# Allegro board panelized_board.brd
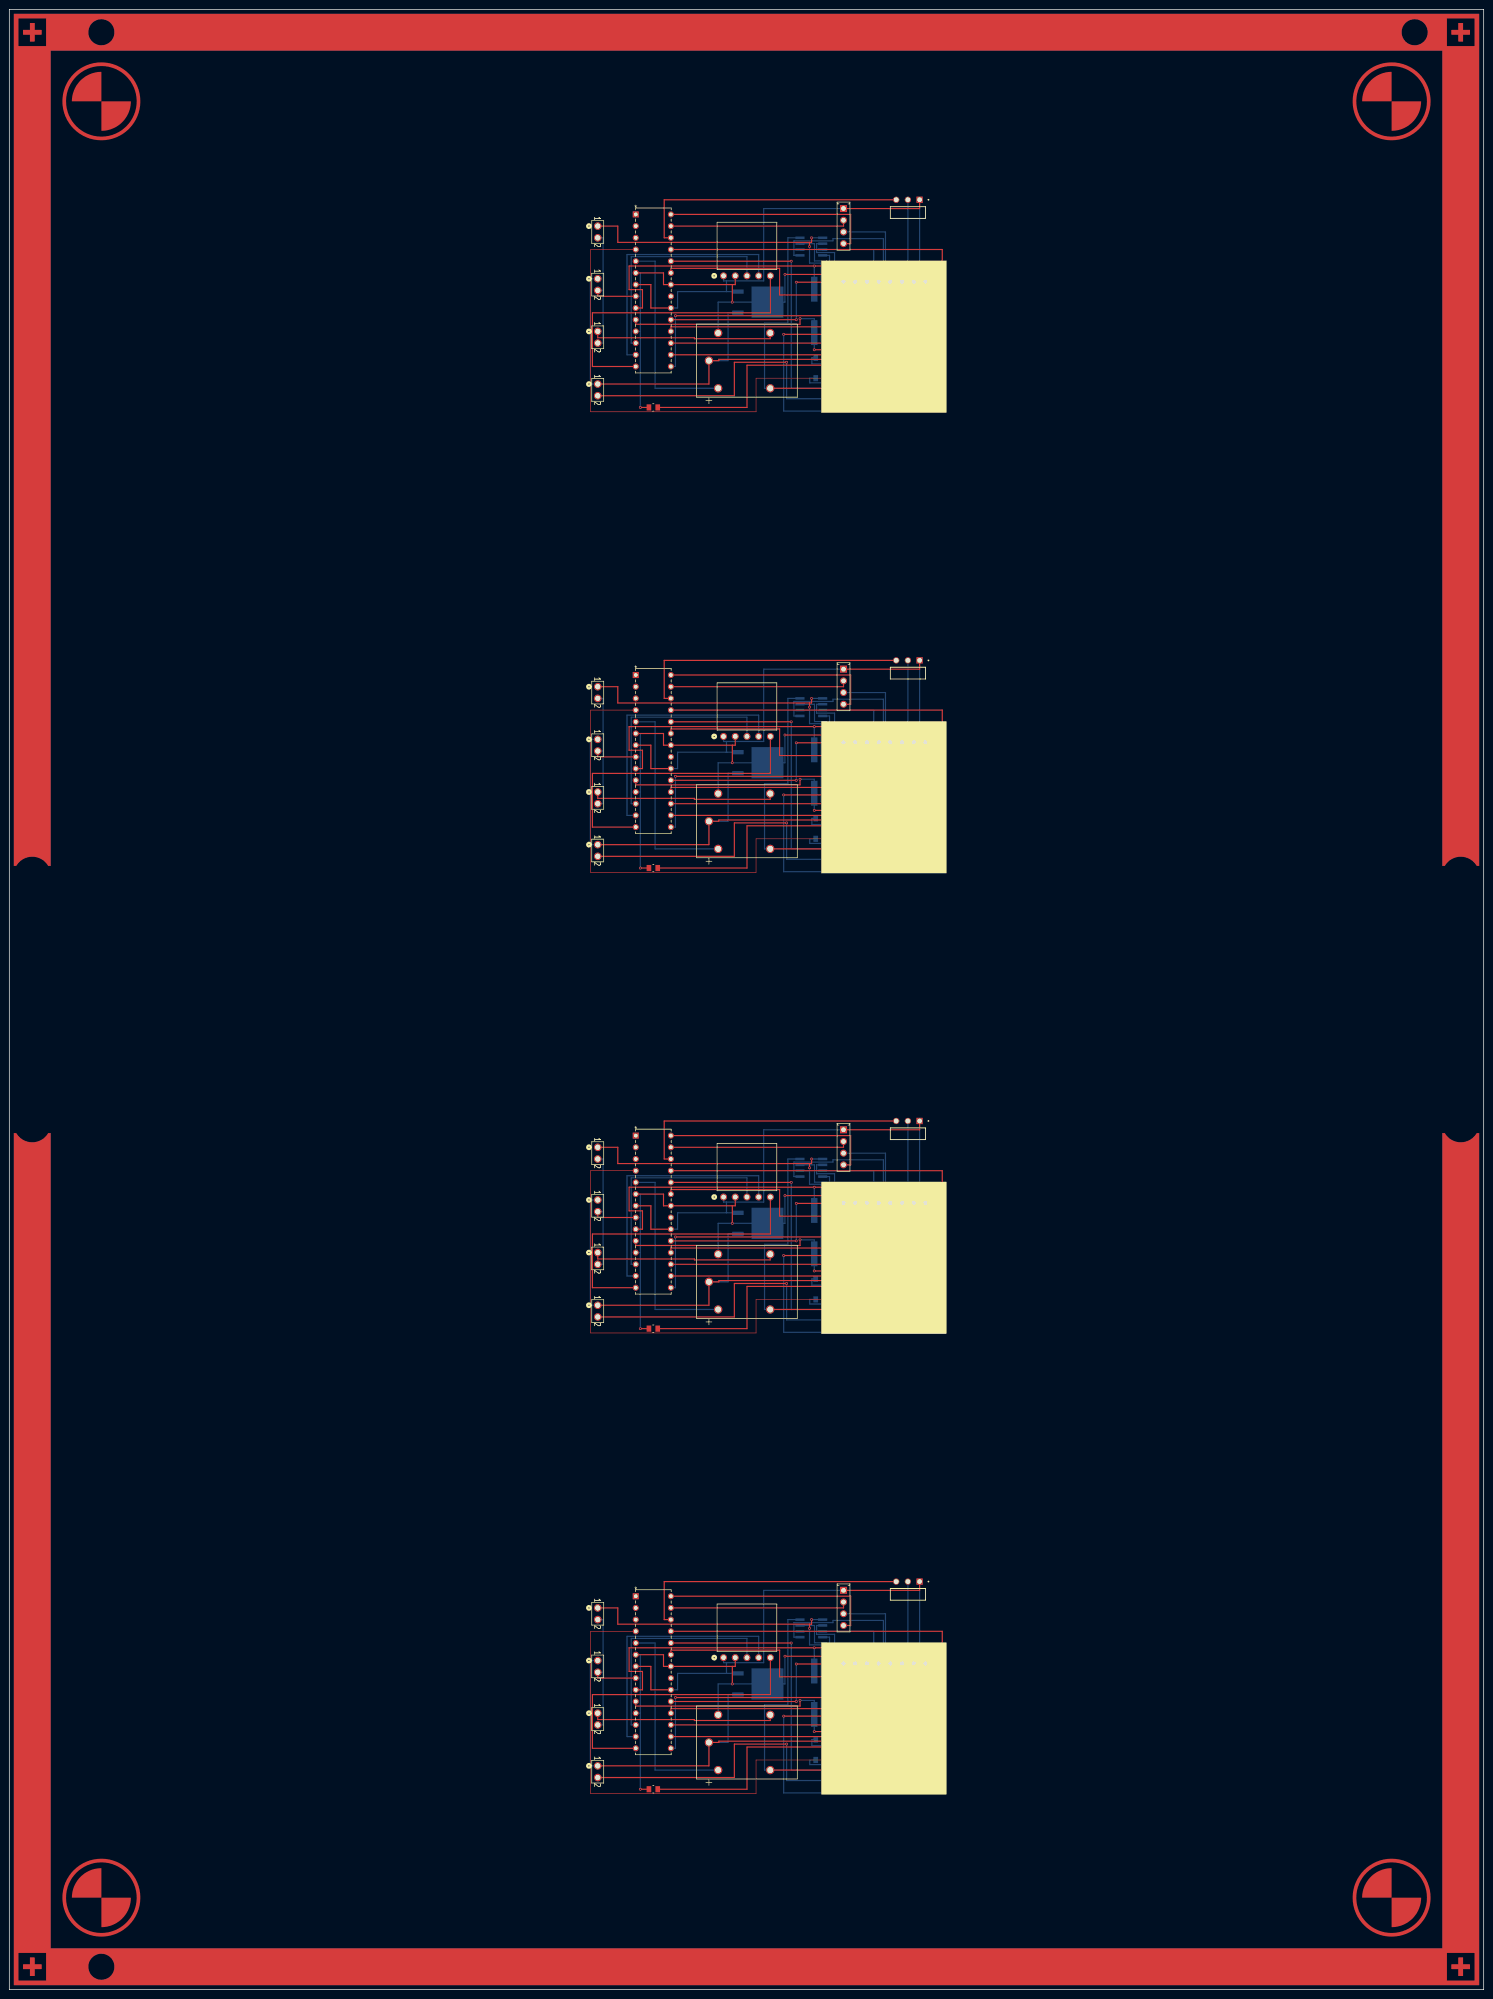
[diagram p0: board, top side]
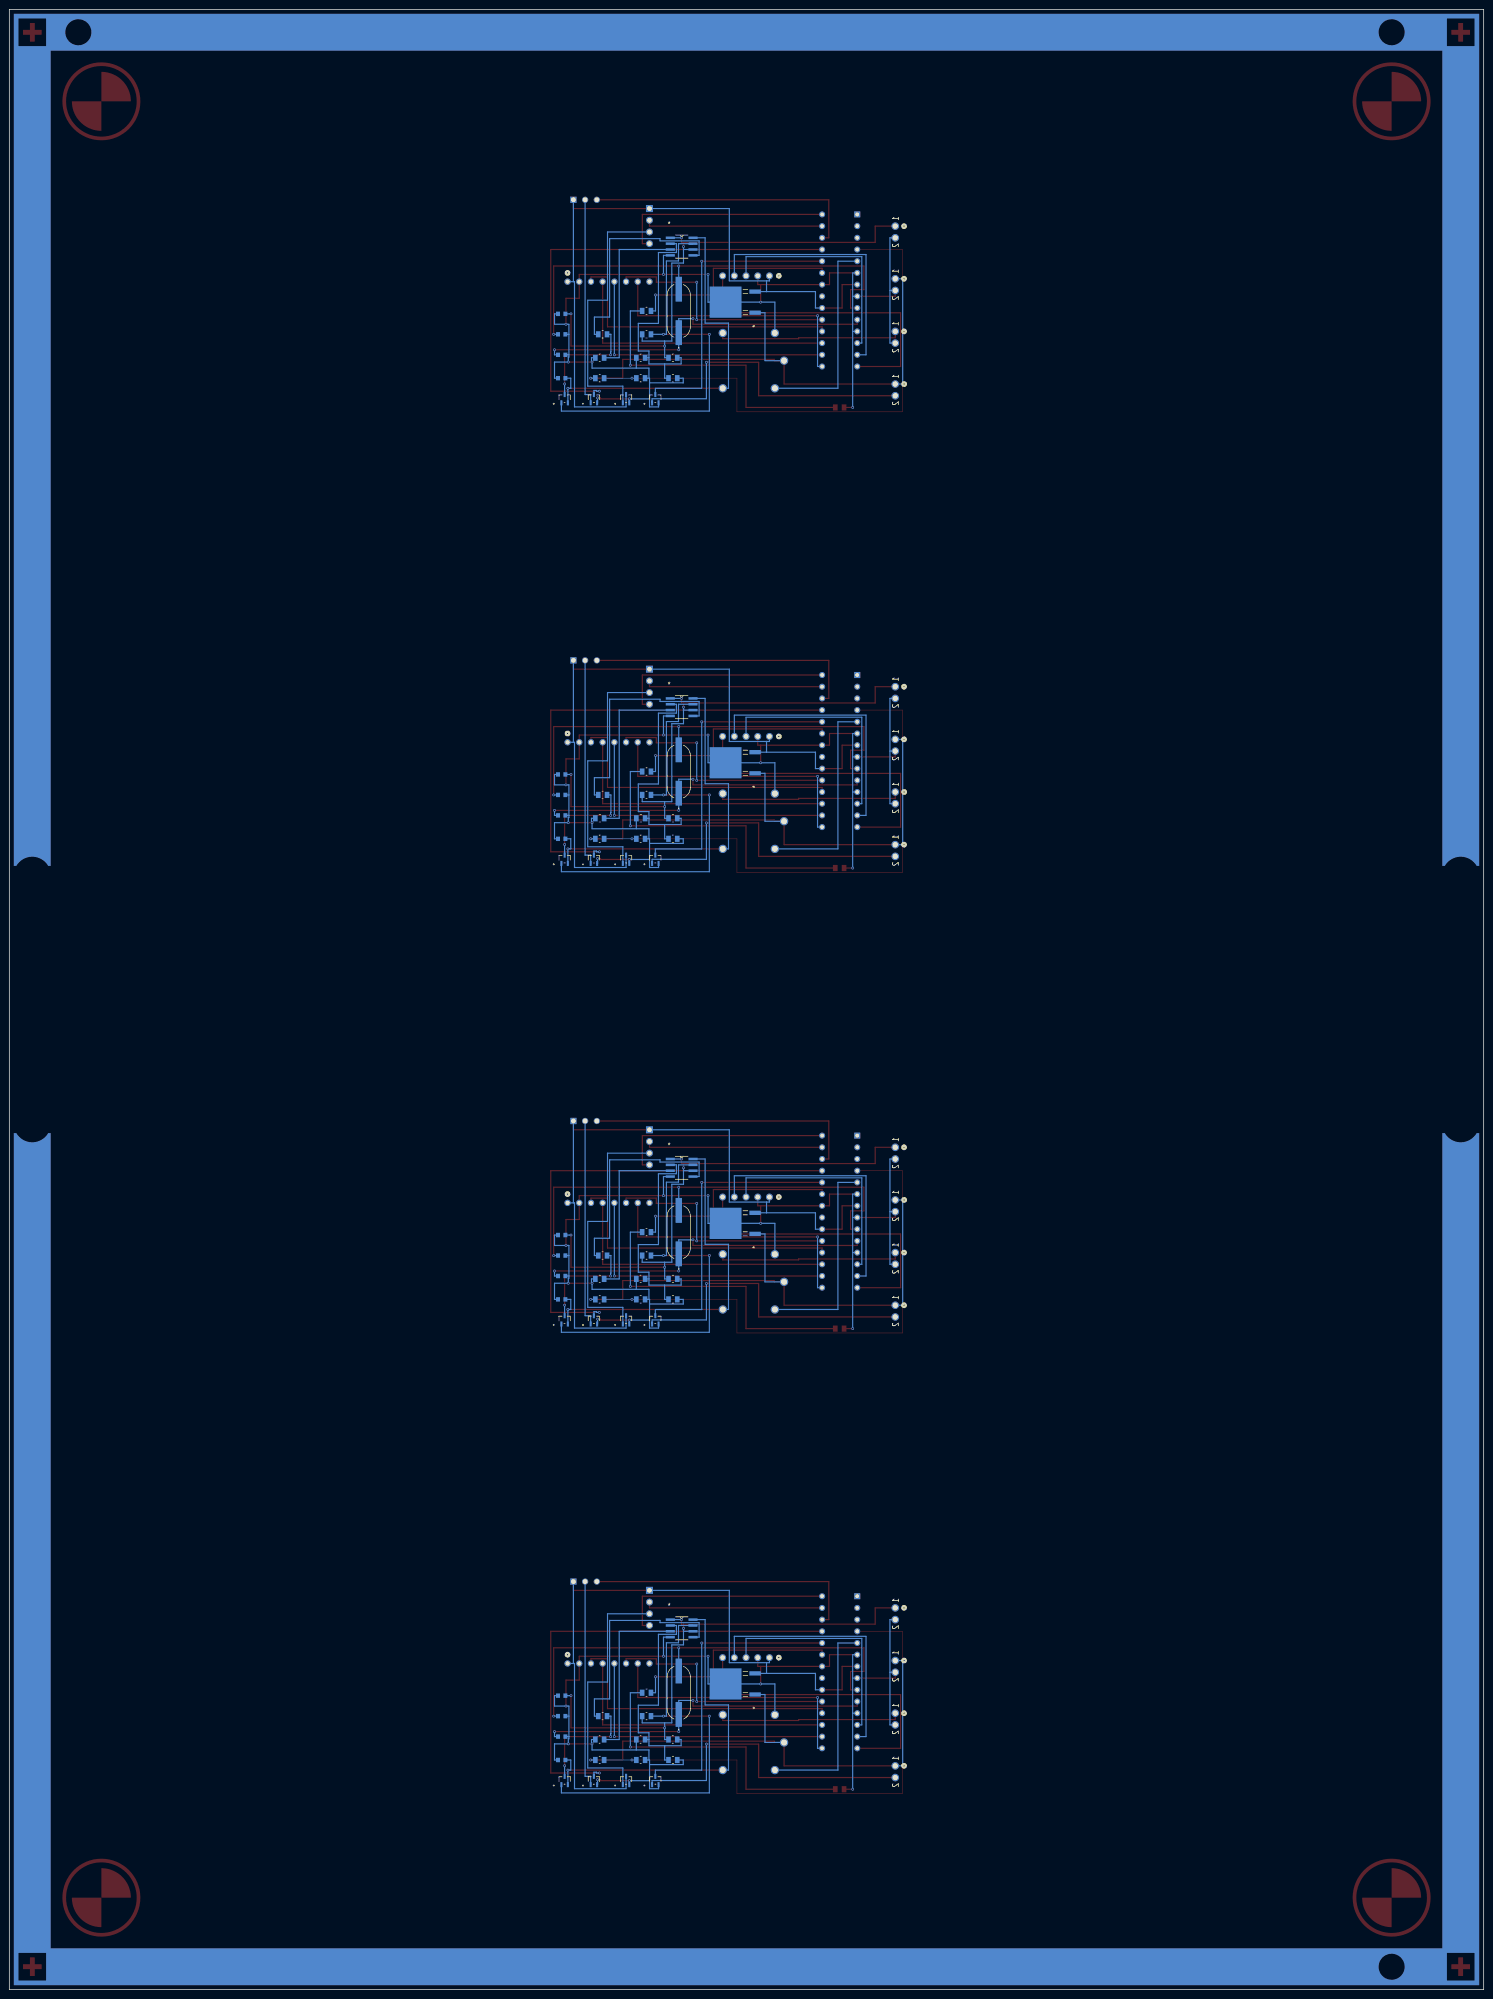
[diagram p1: board, bottom side, seen from below]

Outline 320 x 430 mm; copper layers: TOP, BOTTOM. Coordinates in mm from the lower left corner of the outline.

## Design rules (mm)
constraint set DEFAULT: min track width 0.127
nets with their own width: min track width 0.254; nets P1_GND P1_N38120 P1_N38132 P1_N38170 P1_N38194 P1_N38286 P1_N38318 P1_N38338 P1_N38498 P1_N38548 P1_N42817 P1_N42837 P1_N43205 P1_N43213 P1_N43273 P1_N43289 P1_N43297 P1_N43349 P1_N43399 P1_N43483 P1_N43487 P1_N43499 P1_N43549 P1_N43557 P1_N43597 P1_N43605 P1_N43613 P1_N43625 P1_N43633 P1_N435731 P1_SOL+ P1_SOL- P2_GND P2_N38120 P2_N38132 P2_N38170 P2_N38194 P2_N38286 P2_N38318 P2_N38338 P2_N38498 P2_N38548 P2_N42817 P2_N42837 P2_N43205 P2_N43213 P2_N43273 P2_N43289 P2_N43297 P2_N43349 P2_N43399 P2_N43483 P2_N43487 P2_N43499 P2_N43549 P2_N43557 P2_N43597 P2_N43605 P2_N43613 P2_N43625 P2_N43633 P2_N435731 P2_SOL+ P2_SOL- P3_GND P3_N38120 P3_N38132 P3_N38170 P3_N38194 P3_N38286 P3_N38318 P3_N38338 P3_N38498 P3_N38548 P3_N42817 P3_N42837 P3_N43205 P3_N43213 P3_N43273 P3_N43289 P3_N43297 P3_N43349 P3_N43399 P3_N43483 P3_N43487 P3_N43499 P3_N43549 P3_N43557 P3_N43597 P3_N43605 P3_N43613 P3_N43625 P3_N43633 P3_N435731 P3_SOL+ P3_SOL- P4_GND P4_N38120 P4_N38132 P4_N38170 P4_N38194 P4_N38286 P4_N38318 P4_N38338 P4_N38498 P4_N38548 P4_N42817 P4_N42837 P4_N43205 P4_N43213 P4_N43273 P4_N43289 P4_N43297 P4_N43349 P4_N43399 P4_N43483 P4_N43487 P4_N43499 P4_N43549 P4_N43557 P4_N43597 P4_N43605 P4_N43613 P4_N43625 P4_N43633 P4_N435731 P4_SOL+ P4_SOL-

## Placement (name value [footprint] x y rotation side)
NOREF  -  []  20 5 90 top
NOREF#2  -  []  315 425 0 top
NOREF#3  -  [unnamed#2]  0 0 0 top
NOREF#4  -  []  320 0 90 top
NOREF#5  -  []  0 0 90 top
NOREF#6  -  []  315 425 90 top
NOREF#7  -  []  0 430 0 top
NOREF#8  -  []  315 5 0 top
NOREF#9  -  []  20 425 0 top
P1_B1  12vDc  [CONN_5-146280-2_TYCO]  127.72 82.91 270 top
P1_B2  Bat.  [CONN_5-146280-2_TYCO]  127.72 71.48 270 top
P1_C1  1u  [0603_AVX]  200.1 49.89 180 bottom
P1_C2  22pF  [0603_AVX]  200.1 54.97 180 bottom
P1_C3  22pF  [0603_AVX]  200.1 59.41 180 bottom
P1_C4  .1u  [0603_AVX]  200.1 63.86 180 bottom
P1_CLK2  16Mhz  [XTAL_HC49SM-8-30-50-60-16-AT00]  174.71 64.5 90 bottom
P1_D1  PWR_LED  [0805_PAN]  139.78 43.54 0 top
P1_DHT1  DHT20  [CON4_1X4_P100UM_HDR2_TYC]  181.06 86.72 270 top
P1_J2  solenoid  [CONN_5-146280-2_TYCO]  127.72 48.62 270 top
P1_J3  SP+  [CONN_5-146280-2_TYCO]  127.72 60.05 270 top
P1_K1  RELAY_G5LE-1DC5  [RELAY_G5LE-1DC5_OMR]  151.84 53.7 90 top
P1_MS1  Moisture Sensor  [SAMTEC_TSW-103-25-S-S-RA]  197.56 88.62 0 top
P1_NM1  NMOS  [SOT-323_DIO]  179.78 45.45 180 bottom
P1_NM2  NMOS  [SOT-323_DIO]  186.13 45.45 180 bottom
P1_NM3  NMOS  [SOT-323_DIO]  193.12 45.45 180 bottom
P1_NM4  PMOS  [SOT-323_DIO]  199.47 45.45 180 bottom
P1_R1  1k  [0805_PAN]  181.69 64.5 180 bottom
P1_R2  .2  [0805_PAN]  181.69 59.41 180 bottom
P1_R3  1k  [0805_PAN]  191.22 59.41 180 bottom
P1_R4  15k  [0805_PAN]  182.96 54.34 180 bottom
P1_R5  2k  [0805_PAN]  191.85 54.34 180 bottom
P1_R6  4.6k  [0805_PAN]  175.97 54.34 180 bottom
P1_R7  470  [0805_PAN]  191.85 49.89 180 bottom
P1_R8  658  [0805_PAN]  182.96 49.89 180 bottom
P1_RTHERM  4.7k  [0805_PAN]  175.97 49.89 180 bottom
P1_SD1  SD_Card  [CON8_1X8_TU_TSW]  189.94 70.84 180 top
P1_U1  ATMEGA328-PU  [28P3_SPDIP28_SP_MCH]  135.97 85.45 0 top
P1_U2  LVR  [DPAK-3_ONS]  164.54 66.4 90 bottom
P1_U3  HC-05  [CON5_1X5_P100RM_SHDR_TYC]  155.02 72.11 0 top
P1_U4  BQ2057W_D_8  [D8]  174.07 78.47 180 bottom
P2_B1  12vDc  [CONN_5-146280-2_TYCO]  127.72 182.91 270 top
P2_B2  Bat.  [CONN_5-146280-2_TYCO]  127.72 171.48 270 top
P2_C1  1u  [0603_AVX]  200.1 149.89 180 bottom
P2_C2  22pF  [0603_AVX]  200.1 154.97 180 bottom
P2_C3  22pF  [0603_AVX]  200.1 159.41 180 bottom
P2_C4  .1u  [0603_AVX]  200.1 163.86 180 bottom
P2_CLK2  16Mhz  [XTAL_HC49SM-8-30-50-60-16-AT00]  174.71 164.5 90 bottom
P2_D1  PWR_LED  [0805_PAN]  139.78 143.54 0 top
P2_DHT1  DHT20  [CON4_1X4_P100UM_HDR2_TYC]  181.06 186.72 270 top
P2_J2  solenoid  [CONN_5-146280-2_TYCO]  127.72 148.62 270 top
P2_J3  SP+  [CONN_5-146280-2_TYCO]  127.72 160.05 270 top
P2_K1  RELAY_G5LE-1DC5  [RELAY_G5LE-1DC5_OMR]  151.84 153.7 90 top
P2_MS1  Moisture Sensor  [SAMTEC_TSW-103-25-S-S-RA]  197.56 188.62 0 top
P2_NM1  NMOS  [SOT-323_DIO]  179.78 145.44 180 bottom
P2_NM2  NMOS  [SOT-323_DIO]  186.13 145.44 180 bottom
P2_NM3  NMOS  [SOT-323_DIO]  193.12 145.44 180 bottom
P2_NM4  PMOS  [SOT-323_DIO]  199.47 145.44 180 bottom
P2_R1  1k  [0805_PAN]  181.69 164.5 180 bottom
P2_R2  .2  [0805_PAN]  181.69 159.41 180 bottom
P2_R3  1k  [0805_PAN]  191.22 159.41 180 bottom
P2_R4  15k  [0805_PAN]  182.96 154.34 180 bottom
P2_R5  2k  [0805_PAN]  191.85 154.34 180 bottom
P2_R6  4.6k  [0805_PAN]  175.97 154.34 180 bottom
P2_R7  470  [0805_PAN]  191.85 149.89 180 bottom
P2_R8  658  [0805_PAN]  182.96 149.89 180 bottom
P2_RTHERM  4.7k  [0805_PAN]  175.97 149.89 180 bottom
P2_SD1  SD_Card  [CON8_1X8_TU_TSW]  189.94 170.84 180 top
P2_U1  ATMEGA328-PU  [28P3_SPDIP28_SP_MCH]  135.97 185.45 0 top
P2_U2  LVR  [DPAK-3_ONS]  164.54 166.4 90 bottom
P2_U3  HC-05  [CON5_1X5_P100RM_SHDR_TYC]  155.02 172.12 0 top
P2_U4  BQ2057W_D_8  [D8]  174.07 178.47 180 bottom
P3_B1  12vDc  [CONN_5-146280-2_TYCO]  127.72 282.91 270 top
P3_B2  Bat.  [CONN_5-146280-2_TYCO]  127.72 271.48 270 top
P3_C1  1u  [0603_AVX]  200.1 249.89 180 bottom
P3_C2  22pF  [0603_AVX]  200.1 254.97 180 bottom
P3_C3  22pF  [0603_AVX]  200.1 259.42 180 bottom
P3_C4  .1u  [0603_AVX]  200.1 263.86 180 bottom
P3_CLK2  16Mhz  [XTAL_HC49SM-8-30-50-60-16-AT00]  174.71 264.5 90 bottom
P3_D1  PWR_LED  [0805_PAN]  139.78 243.54 0 top
P3_DHT1  DHT20  [CON4_1X4_P100UM_HDR2_TYC]  181.06 286.72 270 top
P3_J2  solenoid  [CONN_5-146280-2_TYCO]  127.72 248.62 270 top
P3_J3  SP+  [CONN_5-146280-2_TYCO]  127.72 260.05 270 top
P3_K1  RELAY_G5LE-1DC5  [RELAY_G5LE-1DC5_OMR]  151.84 253.7 90 top
P3_MS1  Moisture Sensor  [SAMTEC_TSW-103-25-S-S-RA]  197.56 288.62 0 top
P3_NM1  NMOS  [SOT-323_DIO]  179.78 245.44 180 bottom
P3_NM2  NMOS  [SOT-323_DIO]  186.13 245.44 180 bottom
P3_NM3  NMOS  [SOT-323_DIO]  193.12 245.44 180 bottom
P3_NM4  PMOS  [SOT-323_DIO]  199.47 245.44 180 bottom
P3_R1  1k  [0805_PAN]  181.69 264.5 180 bottom
P3_R2  .2  [0805_PAN]  181.69 259.42 180 bottom
P3_R3  1k  [0805_PAN]  191.22 259.42 180 bottom
P3_R4  15k  [0805_PAN]  182.96 254.34 180 bottom
P3_R5  2k  [0805_PAN]  191.85 254.34 180 bottom
P3_R6  4.6k  [0805_PAN]  175.97 254.34 180 bottom
P3_R7  470  [0805_PAN]  191.85 249.89 180 bottom
P3_R8  658  [0805_PAN]  182.96 249.89 180 bottom
P3_RTHERM  4.7k  [0805_PAN]  175.97 249.89 180 bottom
P3_SD1  SD_Card  [CON8_1X8_TU_TSW]  189.94 270.85 180 top
P3_U1  ATMEGA328-PU  [28P3_SPDIP28_SP_MCH]  135.97 285.45 0 top
P3_U2  LVR  [DPAK-3_ONS]  164.54 266.4 90 bottom
P3_U3  HC-05  [CON5_1X5_P100RM_SHDR_TYC]  155.02 272.12 0 top
P3_U4  BQ2057W_D_8  [D8]  174.07 278.46 180 bottom
P4_B1  12vDc  [CONN_5-146280-2_TYCO]  127.72 382.91 270 top
P4_B2  Bat.  [CONN_5-146280-2_TYCO]  127.72 371.48 270 top
P4_C1  1u  [0603_AVX]  200.1 349.89 180 bottom
P4_C2  22pF  [0603_AVX]  200.1 354.97 180 bottom
P4_C3  22pF  [0603_AVX]  200.1 359.42 180 bottom
P4_C4  .1u  [0603_AVX]  200.1 363.86 180 bottom
P4_CLK2  16Mhz  [XTAL_HC49SM-8-30-50-60-16-AT00]  174.71 364.5 90 bottom
P4_D1  PWR_LED  [0805_PAN]  139.78 343.54 0 top
P4_DHT1  DHT20  [CON4_1X4_P100UM_HDR2_TYC]  181.06 386.72 270 top
P4_J2  solenoid  [CONN_5-146280-2_TYCO]  127.72 348.62 270 top
P4_J3  SP+  [CONN_5-146280-2_TYCO]  127.72 360.05 270 top
P4_K1  RELAY_G5LE-1DC5  [RELAY_G5LE-1DC5_OMR]  151.84 353.7 90 top
P4_MS1  Moisture Sensor  [SAMTEC_TSW-103-25-S-S-RA]  197.56 388.62 0 top
P4_NM1  NMOS  [SOT-323_DIO]  179.78 345.44 180 bottom
P4_NM2  NMOS  [SOT-323_DIO]  186.13 345.44 180 bottom
P4_NM3  NMOS  [SOT-323_DIO]  193.12 345.44 180 bottom
P4_NM4  PMOS  [SOT-323_DIO]  199.47 345.44 180 bottom
P4_R1  1k  [0805_PAN]  181.69 364.5 180 bottom
P4_R2  .2  [0805_PAN]  181.69 359.42 180 bottom
P4_R3  1k  [0805_PAN]  191.22 359.42 180 bottom
P4_R4  15k  [0805_PAN]  182.96 354.33 180 bottom
P4_R5  2k  [0805_PAN]  191.85 354.33 180 bottom
P4_R6  4.6k  [0805_PAN]  175.97 354.33 180 bottom
P4_R7  470  [0805_PAN]  191.85 349.89 180 bottom
P4_R8  658  [0805_PAN]  182.96 349.89 180 bottom
P4_RTHERM  4.7k  [0805_PAN]  175.97 349.89 180 bottom
P4_SD1  SD_Card  [CON8_1X8_TU_TSW]  189.94 370.85 180 top
P4_U1  ATMEGA328-PU  [28P3_SPDIP28_SP_MCH]  135.97 385.45 0 top
P4_U2  LVR  [DPAK-3_ONS]  164.54 366.4 90 bottom
P4_U3  HC-05  [CON5_1X5_P100RM_SHDR_TYC]  155.02 372.12 0 top
P4_U4  BQ2057W_D_8  [D8]  174.07 378.46 180 bottom

## Library data of the parts
P1_B1 P1_B2 P2_B1 P2_B2 P3_B1 P3_B2 P4_B1 P4_B2 = Battery
P1_C1 P1_C2 P2_C1 P2_C2 P3_C1 P3_C2 P4_C1 P4_C2 = C: User Part Number: PN; Tolerance: TOL
P1_C3 P1_C4 P2_C3 P2_C4 P3_C3 P3_C4 P4_C3 P4_C4 = C
P1_CLK2 P2_CLK2 P3_CLK2 P4_CLK2 = Clock: User Part Number: PN; Tolerance: TOL
P1_D1 P2_D1 P3_D1 P4_D1 = MBR7545
P1_DHT1 P2_DHT1 P3_DHT1 P4_DHT1 = DHT20
P1_J2 P1_J3 P2_J2 P2_J3 P3_J2 P3_J3 P4_J2 P4_J3 = 2-pin_header
P1_K1 P2_K1 P3_K1 P4_K1 = G5LE-1DC24
P1_MS1 P2_MS1 P3_MS1 P4_MS1 = Moisture Sensor
P1_NM1-P1_NM4 P2_NM1-P2_NM4 P3_NM1-P3_NM4 P4_NM1-P4_NM4 = N-channel mosfet
P1_R1 P1_R3-P1_R8 P2_R1 P2_R3-P2_R8 P3_R1 P3_R3-P3_R8 P4_R1 P4_R3-P4_R8 = R
P1_R2 P2_R2 P3_R2 P4_R2 = R: User Part Number: PN
P1_RTHERM P2_RTHERM P3_RTHERM P4_RTHERM = R: User Part Number: PN; Tolerance: TOL
P1_SD1 P2_SD1 P3_SD1 P4_SD1 = SD_Card
P1_U1 P2_U1 P3_U1 P4_U1 = ATMEGA328-PU
P1_U2 P2_U2 P3_U2 P4_U2 = LVR: User Part Number: PN; Tolerance: TOL
P1_U3 P2_U3 P3_U3 P4_U3 = HC-05
P1_U4 P2_U4 P3_U4 P4_U4 = BQ2057WSNTR

## Footprints (pads in the part's own frame, mm; a bottom-side part is the same pattern mirrored in y, then rotated)
28P3_SPDIP28_SP_MCH
  rect 1.321x1.321 hole 0.813: 1(0,0)
  round 1.321 hole 0.813: 2(0,-2.54) 3(0,-5.08) 4(0,-7.62) 5(0,-10.16) 6(0,-12.7) 7(0,-15.24) 8(0,-17.78) 9(0,-20.32) 10(0,-22.86) 11(0,-25.4) 12(0,-27.94) 13(0,-30.48) 14(0,-33.02) 15(7.62,-33.02) 16(7.62,-30.48) 17(7.62,-27.94) 18(7.62,-25.4) 19(7.62,-22.86) 20(7.62,-20.32) 21(7.62,-17.78) 22(7.62,-15.24) 23(7.62,-12.7) 24(7.62,-10.16) 25(7.62,-7.62) 26(7.62,-5.08) 27(7.62,-2.54) 28(7.62,0)
0603_AVX
  rect 0.864x0.965 smd: 1(-0.8,0) 2(0.8,0)
0805_PAN
  rect 1.016x1.346 smd: 1(-0.953,0) 2(0.953,0)
CON4_1X4_P100UM_HDR2_TYC
  rect 1.524x1.524 hole 1.016: 1(0,0)
  round 1.524 hole 1.016: 2(2.54,0) 3(5.08,0) 4(7.62,0)
CON5_1X5_P100RM_SHDR_TYC
  round 1.524 hole 1.016: 1(0,0) 2(2.54,0) 3(5.08,0) 4(7.62,0) 5(10.16,0)
CON8_1X8_TU_TSW
  round 1.397 hole 0.889: 1(-8.89,0) 2(-6.35,0) 3(-3.81,0) 4(-1.27,0) 5(1.27,0) 6(3.81,0) 7(6.35,0) 8(8.89,0)
CONN_5-146280-2_TYCO
  round 1.651 hole 1.143: 1(0,0) 2(2.54,0)
D8
  rect 1.981x0.559 smd: 1(-2.464,1.905) 2(-2.464,0.635) 3(-2.464,-0.635) 4(-2.464,-1.905) 5(2.464,-1.905) 6(2.464,-0.635) 7(2.464,0.635) 8(2.464,1.905)
DPAK-3_ONS
  rect 0.94x2.489 smd: 1(-2.29,-6.413) 3(2.29,-6.413)
  rect 6.782x6.934 smd: 2(0,0)
RELAY_G5LE-1DC5_OMR
  round 1.808 hole 1.3: 1(0,0) 2(-6,-2) 3(-6,-13.3) 4(6,-13.3) 5(6,-2)
SAMTEC_TSW-103-25-S-S-RA
  rect 1.37x1.37 hole 1.02: 01(0,0)
  round 1.37 hole 1.02: 02(-2.54,0) 03(-5.08,0)
SOT-323_DIO
  rect 0.451x1.111 smd: 1(-0.7,-0.9) 2(0.7,-0.9) 3(0,0.9)
unnamed#2
  custom 4x4 smd: (5,425) (5,425) (5,5) (5,5) (315,425) (315,425) (315,5) (315,5)
  round 0 hole 2.8 unplated: (20,425) (20,5) (305,425)
XTAL_HC49SM-8-30-50-60-16-AT00
  rect 5.41x1.397 smd: 1(-4.712,0) 2(4.712,0)

## Nets
P1_GND: P1_B1.2(-) P1_B2.2(-) P1_C1.1 P1_C2.2 P1_C3.2 P1_C4.1 P1_D1.1(2) P1_J3.2 P1_K1.5 P1_NM1.2 P1_NM2.2 P1_NM3.2 P1_R4.1 P1_R5.1 P1_R8.2 P1_RTHERM.2 P1_SD1.2(GND) P1_U1.6 P1_U1.8 P1_U1.11 P1_U1.22 P1_U2.2 P1_U3.2 P1_U4.4(VSS)
P1_N38120: P1_B1.1 P1_C4.2 P1_R2.1 P1_R6.1 P1_U4.1 P1_U4.6
P1_N38132: P1_NM4.1 P1_R2.2 P1_U4.7
P1_N38170: P1_C1.2 P1_K1.3 P1_NM4.2 P1_U4.8
P1_N38194: P1_NM4.3 P1_R3.2
P1_N38286: P1_R3.1 P1_U4.5
P1_N38318: P1_R5.2 P1_U4.3
P1_N38338: P1_R4.2 P1_R6.2 P1_RTHERM.1 P1_U4.2
P1_N38498: P1_J3.1 P1_K1.4
P1_N38548: P1_K1.2 P1_U1.5
P1_N38656: P1_R7.2 P1_R8.1 P1_U1.4
P1_N42817: P1_NM1.3 P1_U1.24
P1_N42837: P1_DHT1.1(VCC) P1_MS1.01(VCC) P1_NM2.3 P1_SD1.1 P1_U1.7(VCC) P1_U1.20 P1_U2.3(OUTPUT) P1_U3.1(VCC)
P1_N43205: P1_C3.1 P1_CLK2.2 P1_U1.9
P1_N43213: P1_DHT1.4 P1_U1.28
P1_N43273: P1_DHT1.2 P1_U1.27
P1_N43289: P1_DHT1.3 P1_NM2.1
P1_N43297: P1_MS1.03 P1_U1.26
P1_N43349: P1_NM3.3 P1_U1.25
P1_N43399: P1_R1.2 P1_U1.23
P1_N43483: P1_C2.1 P1_CLK2.1 P1_U1.10
P1_N43487: P1_SD1.6 P1_U1.19
P1_N43499: P1_SD1.3 P1_U1.18
P1_N43549: P1_U1.12 P1_U3.3
P1_N43557: P1_SD1.4 P1_U1.17
P1_N43597: P1_U1.13 P1_U3.4
P1_N43605: P1_SD1.5 P1_U1.16
P1_N43613: P1_MS1.02 P1_NM3.1
P1_N43625: P1_U1.14 P1_U3.5
P1_N43633: P1_SD1.7 P1_U1.15
P1_N435731: P1_D1.2 P1_R1.1
P1_SOL+: P1_B2.1 P1_J2.1 P1_K1.1 P1_R7.1 P1_U2.1
P1_SOL-: P1_J2.2 P1_NM1.1
P2_GND: P2_B1.2(-) P2_B2.2(-) P2_C1.1 P2_C2.2 P2_C3.2 P2_C4.1 P2_D1.1(2) P2_J3.2 P2_K1.5 P2_NM1.2 P2_NM2.2 P2_NM3.2 P2_R4.1 P2_R5.1 P2_R8.2 P2_RTHERM.2 P2_SD1.2(GND) P2_U1.6 P2_U1.8 P2_U1.11 P2_U1.22 P2_U2.2 P2_U3.2 P2_U4.4(VSS)
P2_N38120: P2_B1.1 P2_C4.2 P2_R2.1 P2_R6.1 P2_U4.1 P2_U4.6
P2_N38132: P2_NM4.1 P2_R2.2 P2_U4.7
P2_N38170: P2_C1.2 P2_K1.3 P2_NM4.2 P2_U4.8
P2_N38194: P2_NM4.3 P2_R3.2
P2_N38286: P2_R3.1 P2_U4.5
P2_N38318: P2_R5.2 P2_U4.3
P2_N38338: P2_R4.2 P2_R6.2 P2_RTHERM.1 P2_U4.2
P2_N38498: P2_J3.1 P2_K1.4
P2_N38548: P2_K1.2 P2_U1.5
P2_N38656: P2_R7.2 P2_R8.1 P2_U1.4
P2_N42817: P2_NM1.3 P2_U1.24
P2_N42837: P2_DHT1.1(VCC) P2_MS1.01(VCC) P2_NM2.3 P2_SD1.1 P2_U1.7(VCC) P2_U1.20 P2_U2.3(OUTPUT) P2_U3.1(VCC)
P2_N43205: P2_C3.1 P2_CLK2.2 P2_U1.9
P2_N43213: P2_DHT1.4 P2_U1.28
P2_N43273: P2_DHT1.2 P2_U1.27
P2_N43289: P2_DHT1.3 P2_NM2.1
P2_N43297: P2_MS1.03 P2_U1.26
P2_N43349: P2_NM3.3 P2_U1.25
P2_N43399: P2_R1.2 P2_U1.23
P2_N43483: P2_C2.1 P2_CLK2.1 P2_U1.10
P2_N43487: P2_SD1.6 P2_U1.19
P2_N43499: P2_SD1.3 P2_U1.18
P2_N43549: P2_U1.12 P2_U3.3
P2_N43557: P2_SD1.4 P2_U1.17
P2_N43597: P2_U1.13 P2_U3.4
P2_N43605: P2_SD1.5 P2_U1.16
P2_N43613: P2_MS1.02 P2_NM3.1
P2_N43625: P2_U1.14 P2_U3.5
P2_N43633: P2_SD1.7 P2_U1.15
P2_N435731: P2_D1.2 P2_R1.1
P2_SOL+: P2_B2.1 P2_J2.1 P2_K1.1 P2_R7.1 P2_U2.1
P2_SOL-: P2_J2.2 P2_NM1.1
P3_GND: P3_B1.2(-) P3_B2.2(-) P3_C1.1 P3_C2.2 P3_C3.2 P3_C4.1 P3_D1.1(2) P3_J3.2 P3_K1.5 P3_NM1.2 P3_NM2.2 P3_NM3.2 P3_R4.1 P3_R5.1 P3_R8.2 P3_RTHERM.2 P3_SD1.2(GND) P3_U1.6 P3_U1.8 P3_U1.11 P3_U1.22 P3_U2.2 P3_U3.2 P3_U4.4(VSS)
P3_N38120: P3_B1.1 P3_C4.2 P3_R2.1 P3_R6.1 P3_U4.1 P3_U4.6
P3_N38132: P3_NM4.1 P3_R2.2 P3_U4.7
P3_N38170: P3_C1.2 P3_K1.3 P3_NM4.2 P3_U4.8
P3_N38194: P3_NM4.3 P3_R3.2
P3_N38286: P3_R3.1 P3_U4.5
P3_N38318: P3_R5.2 P3_U4.3
P3_N38338: P3_R4.2 P3_R6.2 P3_RTHERM.1 P3_U4.2
P3_N38498: P3_J3.1 P3_K1.4
P3_N38548: P3_K1.2 P3_U1.5
P3_N38656: P3_R7.2 P3_R8.1 P3_U1.4
P3_N42817: P3_NM1.3 P3_U1.24
P3_N42837: P3_DHT1.1(VCC) P3_MS1.01(VCC) P3_NM2.3 P3_SD1.1 P3_U1.7(VCC) P3_U1.20 P3_U2.3(OUTPUT) P3_U3.1(VCC)
P3_N43205: P3_C3.1 P3_CLK2.2 P3_U1.9
P3_N43213: P3_DHT1.4 P3_U1.28
P3_N43273: P3_DHT1.2 P3_U1.27
P3_N43289: P3_DHT1.3 P3_NM2.1
P3_N43297: P3_MS1.03 P3_U1.26
P3_N43349: P3_NM3.3 P3_U1.25
P3_N43399: P3_R1.2 P3_U1.23
P3_N43483: P3_C2.1 P3_CLK2.1 P3_U1.10
P3_N43487: P3_SD1.6 P3_U1.19
P3_N43499: P3_SD1.3 P3_U1.18
P3_N43549: P3_U1.12 P3_U3.3
P3_N43557: P3_SD1.4 P3_U1.17
P3_N43597: P3_U1.13 P3_U3.4
P3_N43605: P3_SD1.5 P3_U1.16
P3_N43613: P3_MS1.02 P3_NM3.1
P3_N43625: P3_U1.14 P3_U3.5
P3_N43633: P3_SD1.7 P3_U1.15
P3_N435731: P3_D1.2 P3_R1.1
P3_SOL+: P3_B2.1 P3_J2.1 P3_K1.1 P3_R7.1 P3_U2.1
P3_SOL-: P3_J2.2 P3_NM1.1
P4_GND: P4_B1.2(-) P4_B2.2(-) P4_C1.1 P4_C2.2 P4_C3.2 P4_C4.1 P4_D1.1(2) P4_J3.2 P4_K1.5 P4_NM1.2 P4_NM2.2 P4_NM3.2 P4_R4.1 P4_R5.1 P4_R8.2 P4_RTHERM.2 P4_SD1.2(GND) P4_U1.6 P4_U1.8 P4_U1.11 P4_U1.22 P4_U2.2 P4_U3.2 P4_U4.4(VSS)
P4_N38120: P4_B1.1 P4_C4.2 P4_R2.1 P4_R6.1 P4_U4.1 P4_U4.6
P4_N38132: P4_NM4.1 P4_R2.2 P4_U4.7
P4_N38170: P4_C1.2 P4_K1.3 P4_NM4.2 P4_U4.8
P4_N38194: P4_NM4.3 P4_R3.2
P4_N38286: P4_R3.1 P4_U4.5
P4_N38318: P4_R5.2 P4_U4.3
P4_N38338: P4_R4.2 P4_R6.2 P4_RTHERM.1 P4_U4.2
P4_N38498: P4_J3.1 P4_K1.4
P4_N38548: P4_K1.2 P4_U1.5
P4_N38656: P4_R7.2 P4_R8.1 P4_U1.4
P4_N42817: P4_NM1.3 P4_U1.24
P4_N42837: P4_DHT1.1(VCC) P4_MS1.01(VCC) P4_NM2.3 P4_SD1.1 P4_U1.7(VCC) P4_U1.20 P4_U2.3(OUTPUT) P4_U3.1(VCC)
P4_N43205: P4_C3.1 P4_CLK2.2 P4_U1.9
P4_N43213: P4_DHT1.4 P4_U1.28
P4_N43273: P4_DHT1.2 P4_U1.27
P4_N43289: P4_DHT1.3 P4_NM2.1
P4_N43297: P4_MS1.03 P4_U1.26
P4_N43349: P4_NM3.3 P4_U1.25
P4_N43399: P4_R1.2 P4_U1.23
P4_N43483: P4_C2.1 P4_CLK2.1 P4_U1.10
P4_N43487: P4_SD1.6 P4_U1.19
P4_N43499: P4_SD1.3 P4_U1.18
P4_N43549: P4_U1.12 P4_U3.3
P4_N43557: P4_SD1.4 P4_U1.17
P4_N43597: P4_U1.13 P4_U3.4
P4_N43605: P4_SD1.5 P4_U1.16
P4_N43613: P4_MS1.02 P4_NM3.1
P4_N43625: P4_U1.14 P4_U3.5
P4_N43633: P4_SD1.7 P4_U1.15
P4_N435731: P4_D1.2 P4_R1.1
P4_SOL+: P4_B2.1 P4_J2.1 P4_K1.1 P4_R7.1 P4_U2.1
P4_SOL-: P4_J2.2 P4_NM1.1

Pads without a net: P1_SD1 8; P1_U1 1 2 3 21; P2_SD1 8; P2_U1 1 2 3 21; P3_SD1 8; P3_U1 1 2 3 21; P4_SD1 8; P4_U1 1 2 3 21

## Via types
v1: diameter 0.61, hole 0.33, TOP to BOTTOM, 136 vias

## Routing (per net, layer and track width the routed paths; a pad name or vN(x,y) marks a point on that pad's centre or on a via; arc(x,y) is an arc through that point)
P1_GND: length 255.8
  TOP w0.254: v1(192.32,45.61) 191.69,45.61 191.69,45.41 v1(185.44,45.41) ; P1_B2.2 127.72,67.67 P1_U1.8 ; P1_U3.2 157.56,70.21 156.93,70.21 ; P1_D1.1 v1(136.96,43.54) ; 156.93,70.21 P1_U1.22 141.99,70.21 141.99,72.75 P1_U1.6 ; 156.93,70.21 v1(156.93,66.4) ; v1(199.18,61.6) 199.18,67.24 196.29,67.24 P1_SD1.2 196.29,72.42 v1(178.02,72.42) v1(168.34,72.42) ; v1(198.67,53.4) v1(193.51,53.4)
  BOTTOM w0.254: 198.54,59.41 198.54,61.6 v1(199.18,61.6) 201.67,61.6 201.67,63.86 P1_C4.1 ; 198.54,59.41 P1_C3.2 ; 198.54,59.41 198.54,54.97 ; P1_R8.2 181.17,49.89 ; 181.17,49.89 181.04,49.89 181.04,48.89 ; 181.17,49.89 181.17,52.07 183.91,52.07 ; 136.96,67.67 136.96,60.05 ; 136.96,67.67 P1_U1.8 ; 136.96,67.67 136.96,72.75 P1_U1.6 ; 136.96,60.05 P1_U1.11 ; 136.96,60.05 v1(136.96,43.54) ; P1_RTHERM.2 173.73,49.89 173.73,48.89 181.04,48.89 ; 128.87,68.94 128.87,80.37 P1_B1.2 ; 128.87,68.94 P1_B2.2 ; 128.87,68.94 128.87,57.51 P1_J3.2 ; 181.04,48.89 181.04,45.41 ; 198.54,54.97 198.54,54.49 198.67,54.49 v1(198.67,53.4) 201.67,53.4 201.67,49.89 P1_C1.1 ; 198.54,54.97 P1_C2.2 ; 181.04,45.41 v1(185.44,45.41) P1_NM2.2 ; 181.04,45.41 181.04,43.66 179.09,43.66 P1_NM1.2 ; 183.91,52.07 193.51,52.07 v1(193.51,53.4) 193.64,53.4 193.64,54.34 P1_R5.1 ; 183.91,52.07 P1_R4.1 ; P1_NM3.2 192.32,44.55 v1(192.32,45.61) ; P1_U4.4 178.02,76.56 v1(178.02,72.42) ; v1(168.34,72.42) 168.34,66.4 P1_U2.2 v1(156.93,66.4) 153.84,66.4 P1_K1.5
P1_N38120: length 120.2
  TOP w0.254: 173.68,79.38 174.12,79.38 v1(174.12,80.37) ; 173.68,79.38 v1(173.68,78.47) ; 173.68,79.38 132.07,79.38 132.07,82.91 P1_B1.1 ; v1(198.09,63.86) 198.09,56.88 v1(177.77,56.88)
  BOTTOM w0.254: P1_U4.6 173.68,77.83 ; 173.68,77.83 v1(173.68,78.47) ; 173.68,77.83 173.68,74.88 176.2,74.88 176.2,57.95 177.77,57.95 ; P1_R6.1 177.77,54.34 v1(177.77,56.88) 177.77,57.95 ; P1_U4.1 v1(174.12,80.37) ; 177.77,57.95 182.64,57.95 P1_R2.1 ; P1_C4.2 v1(198.09,63.86)
P1_N38132: length 89.4
  TOP w0.254: v1(168.06,59.41) v1(178.02,59.41)
  BOTTOM w0.254: P1_NM4.1 200.17,42.74 168.06,42.74 v1(168.06,59.41) ; P1_U4.7 174.76,79.1 174.76,75.34 177.38,75.34 177.38,59.41 v1(178.02,59.41) P1_R2.2
P1_N38170: length 82.4
  TOP w0.254: v1(198.77,47.7) P1_K1.3
  BOTTOM w0.254: P1_K1.3 163.91,47.7 163.91,61.85 168.98,61.85 168.98,80.37 P1_U4.8 ; P1_C1.2 198.13,49.89 198.13,47.7 v1(198.77,47.7) P1_NM4.2
P1_N38194: length 24
  TOP w0.254: v1(199.47,48.65) 199.47,54.97 v1(189.49,54.97)
  BOTTOM w0.254: v1(189.49,54.97) 189.49,55.6 189.42,55.6 189.42,59.41 P1_R3.2 ; P1_NM4.3 v1(199.47,48.65)
P1_N38286: length 49.3
  BOTTOM w0.254: P1_U4.5 170.29,76.56 170.29,79.71 178.77,79.71 178.77,80.19 189.7,80.19 189.7,63.16 193.01,63.16 193.01,59.41 P1_R3.1
P1_N38318: length 37.9
  BOTTOM w0.254: P1_R5.2 187.62,54.34 187.62,77.83 P1_U4.3
P1_N38338: length 52
  BOTTOM w0.254: 181.17,54.34 181.17,52.99 177.77,52.99 ; 181.17,54.34 181.17,55.8 183.48,55.8 183.48,61.79 179.11,61.79 179.11,77.17 175.21,77.17 175.21,79.1 P1_U4.2 ; 181.17,54.34 P1_R4.2 ; 177.77,52.99 177.77,49.89 P1_RTHERM.1 ; 177.77,52.99 174.18,52.99 174.18,54.34 P1_R6.2
P1_N38498: length 40.2
  TOP w0.254: P1_J3.1 127.72,58.67 148.7,58.67 148.7,58.47 165.14,58.47 P1_K1.4
P1_N38548: length 45.5
  BOTTOM w0.254: P1_U1.5 140.16,75.29 140.16,47.7 P1_K1.2
P1_N38656: length 118
  TOP w0.127: P1_U1.4 126.17,77.83 126.17,42.6 162.08,42.6 162.08,49.89 v1(184.85,49.89)
  BOTTOM w0.127: P1_R7.2 v1(184.85,49.89) P1_R8.1
P1_N42817: length 65.1
  TOP w0.254: P1_U1.24 v1(169.71,75.29)
  BOTTOM w0.254: v1(169.71,75.29) 169.71,47.69 179.78,47.69 P1_NM1.3
P1_N42837: length 154.7
  TOP w0.254: P1_U1.20 139.25,65.13 139.25,70.21 P1_U1.7 ; P1_MS1.01 197.56,86.72 P1_DHT1.1
  BOTTOM w0.254: 155.66,71.02 163.73,71.02 163.73,86.72 P1_DHT1.1 ; 155.66,71.02 155.02,71.02 P1_U3.1 ; 155.66,71.02 155.66,68.69 ; 155.66,68.69 145.04,68.69 145.04,65.13 P1_U1.20 ; 155.66,68.69 P1_U2.3 ; 198.84,70.84 197.56,70.84 ; 197.56,70.84 P1_MS1.01 ; 197.56,70.84 197.32,70.84 197.32,43.66 186.13,43.66 P1_NM2.3
P1_N43205: length 101.6
  TOP w0.254: P1_U1.9 137.42,65.13 137.42,69.12 134.52,69.12 134.52,74.25 v1(174.71,74.25) 201.84,74.25 v1(201.84,59.41)
  BOTTOM w0.254: P1_C3.1 v1(201.84,59.41) ; P1_CLK2.2 v1(174.71,74.25)
P1_N43213: length 46.9
  TOP w0.254: P1_U1.28 182.6,85.45 182.6,79.1 P1_DHT1.4
P1_N43273: length 38.7
  TOP w0.254: P1_U1.27 181.06,82.91 P1_DHT1.2
P1_N43289: length 58.1
  BOTTOM w0.254: 186.84,44.55 186.84,48.16 194.45,48.16 194.45,66.82 190.16,66.82 190.16,81.64 P1_DHT1.3
P1_N43297: length 60
  TOP w0.254: P1_U1.26 142.14,80.37 142.14,88.62 P1_MS1.03
P1_N43349: length 102.4
  TOP w0.254: v1(191.93,47.06) 202.48,47.06 202.48,77.83 P1_U1.25
  BOTTOM w0.254: v1(191.93,47.06) 192.56,47.06 192.56,47.23 193.12,47.23 P1_NM3.3
P1_N43399: length 47.4
  TOP w0.254: P1_U1.23 143.59,73.74 167.19,73.74 167.19,67.96 v1(179.75,67.96)
  BOTTOM w0.254: P1_R1.2 179.75,64.5 v1(179.75,67.96)
P1_N43483: length 76.5
  TOP w0.254: v1(174.71,56.06) v1(201.67,56.06) ; P1_U1.10 135.97,61.6 171.62,61.6 v1(171.62,62.82)
  BOTTOM w0.254: v1(174.71,56.06) P1_CLK2.1 174.71,62.82 v1(171.62,62.82) ; v1(201.67,56.06) 201.67,54.97 P1_C2.1
P1_N43487: length 52.9
  TOP w0.254: v1(170.81,70.73) 179.57,70.73 179.57,71.87 186.13,71.87 P1_SD1.6 ; P1_U1.19 v1(170.81,62.59)
  BOTTOM w0.254: v1(170.81,62.59) v1(170.81,70.73)
P1_N43499: length 63
  TOP w0.254: P1_U1.18 143.59,61.04 190.16,61.04 190.16,71.87 193.75,71.87 P1_SD1.3
P1_N43549: length 49
  BOTTOM w0.254: P1_U3.3 160.1,76.28 134.98,76.28 134.98,57.51 P1_U1.12
P1_N43557: length 61
  TOP w0.254: P1_SD1.4 191.22,57.51 P1_U1.17
P1_N43597: length 56.9
  BOTTOM w0.254: P1_U3.4 162.64,76.74 134.06,76.74 134.06,54.97 P1_U1.13
P1_N43605: length 61
  TOP w0.254: P1_U1.16 v1(188.68,54.97)
  BOTTOM w0.254: 188.68,70.84 v1(188.68,54.97)
P1_N43613: length 45.3
  BOTTOM w0.254: P1_NM3.1 193.82,46.35 195.03,46.35 P1_MS1.02
P1_N43625: length 67.7
  TOP w0.254: P1_U3.5 165.18,64.09 126.56,64.09 126.56,52.43 P1_U1.14
P1_N43633: length 58.4
  TOP w0.254: v1(144.58,63.45) 183.59,63.45 P1_SD1.7
  BOTTOM w0.254: P1_U1.15 144.58,52.43 v1(144.58,63.45)
P1_N435731: length 68
  TOP w0.254: v1(185.21,52.71) 160.11,52.71 160.11,43.54 P1_D1.2
  BOTTOM w0.254: P1_R1.1 185.21,64.5 v1(185.21,52.71)
P1_SOL+: length 119.4
  TOP w0.254: v1(193.82,49.89) 186.86,49.89 186.86,53.98 153.99,53.98 153.99,53.7 P1_K1.1 151.84,48.62 P1_J2.1
  BOTTOM w0.254: P1_B2.1 126.1,71.48 126.1,48.62 P1_J2.1 ; P1_R7.1 v1(193.82,49.89) ; P1_K1.1 155.99,53.7 155.99,64.11 P1_U2.1
P1_SOL-: length 68.8
  TOP w0.254: P1_J2.2 157.37,46.08 157.37,53.34 v1(168.7,53.34)
  BOTTOM w0.254: v1(168.7,53.34) 168.7,45.43 180.49,45.43 P1_NM1.1
P2_GND: length 255.8
  TOP w0.254: v1(185.44,145.41) 191.69,145.41 191.69,145.61 v1(192.32,145.61) ; 156.93,170.21 P2_U1.22 141.99,170.21 141.99,172.75 P2_U1.6 ; 156.93,170.21 157.56,170.21 P2_U3.2 ; 156.93,170.21 v1(156.93,166.4) ; v1(199.18,161.6) 199.18,167.24 196.29,167.24 P2_SD1.2 196.29,172.42 v1(178.02,172.42) v1(168.34,172.42) ; v1(198.67,153.4) v1(193.51,153.4) ; P2_B2.2 127.72,167.67 P2_U1.8 ; P2_D1.1 v1(136.96,143.54)
  BOTTOM w0.254: P2_C1.1 201.67,149.89 201.67,153.4 v1(198.67,153.4) 198.67,154.49 198.54,154.49 198.54,154.97 ; 136.96,167.67 136.96,172.75 P2_U1.6 ; 136.96,167.67 P2_U1.8 ; 136.96,167.67 136.96,160.05 ; 198.54,154.97 198.54,159.41 ; 198.54,154.97 P2_C2.2 ; P2_R8.2 181.17,149.89 ; 181.17,149.89 181.04,149.89 181.04,148.89 ; 181.17,149.89 181.17,152.07 183.91,152.07 ; 198.54,159.41 198.54,161.6 v1(199.18,161.6) 201.67,161.6 201.67,163.86 P2_C4.1 ; 198.54,159.41 P2_C3.2 ; P2_NM1.2 179.09,143.66 181.04,143.66 181.04,145.41 ; 181.04,148.89 181.04,145.41 ; 181.04,148.89 173.73,148.89 173.73,149.89 P2_RTHERM.2 ; 181.04,145.41 v1(185.44,145.41) P2_NM2.2 ; v1(168.34,172.42) 168.34,166.4 P2_U2.2 v1(156.93,166.4) 153.84,166.4 P2_K1.5 ; 183.91,152.07 193.51,152.07 v1(193.51,153.4) 193.64,153.4 193.64,154.34 P2_R5.1 ; 183.91,152.07 P2_R4.1 ; 128.87,168.94 128.87,180.37 P2_B1.2 ; 128.87,168.94 128.87,157.51 P2_J3.2 ; 128.87,168.94 P2_B2.2 ; v1(136.96,143.54) 136.96,160.05 ; 136.96,160.05 P2_U1.11 ; v1(192.32,145.61) 192.32,144.55 P2_NM3.2 ; P2_U4.4 178.02,176.56 v1(178.02,172.42)
P2_N38120: length 120.2
  TOP w0.254: v1(177.77,156.88) 198.09,156.88 v1(198.09,163.86) ; v1(173.68,178.47) 173.68,179.38 ; 173.68,179.38 132.07,179.38 132.07,182.91 P2_B1.1 ; 173.68,179.38 174.12,179.38 v1(174.12,180.37)
  BOTTOM w0.254: v1(173.68,178.47) 173.68,177.83 ; 173.68,177.83 P2_U4.6 ; 173.68,177.83 173.68,174.88 176.2,174.88 176.2,157.95 177.77,157.95 ; 177.77,157.95 182.64,157.95 P2_R2.1 ; 177.77,157.95 v1(177.77,156.88) 177.77,154.34 P2_R6.1 ; P2_U4.1 v1(174.12,180.37) ; P2_C4.2 v1(198.09,163.86)
P2_N38132: length 89.4
  TOP w0.254: v1(168.06,159.41) v1(178.02,159.41)
  BOTTOM w0.254: P2_U4.7 174.76,179.1 174.76,175.34 177.38,175.34 177.38,159.41 v1(178.02,159.41) P2_R2.2 ; P2_NM4.1 200.17,142.74 168.06,142.74 v1(168.06,159.41)
P2_N38170: length 82.4
  TOP w0.254: v1(198.77,147.7) P2_K1.3
  BOTTOM w0.254: P2_C1.2 198.13,149.89 198.13,147.7 v1(198.77,147.7) P2_NM4.2 ; P2_U4.8 168.98,180.37 168.98,161.85 163.91,161.85 163.91,147.7 P2_K1.3
P2_N38194: length 24
  TOP w0.254: v1(199.47,148.65) 199.47,154.97 v1(189.49,154.97)
  BOTTOM w0.254: P2_R3.2 189.42,159.41 189.42,155.6 189.49,155.6 v1(189.49,154.97) ; P2_NM4.3 v1(199.47,148.65)
P2_N38286: length 49.3
  BOTTOM w0.254: P2_R3.1 193.01,159.41 193.01,163.16 189.7,163.16 189.7,180.19 178.77,180.19 178.77,179.71 170.29,179.71 170.29,176.56 P2_U4.5
P2_N38318: length 37.9
  BOTTOM w0.254: P2_U4.3 187.62,177.83 187.62,154.34 P2_R5.2
P2_N38338: length 52
  BOTTOM w0.254: 177.77,152.99 177.77,149.89 P2_RTHERM.1 ; 177.77,152.99 174.18,152.99 174.18,154.34 P2_R6.2 ; 177.77,152.99 181.17,152.99 181.17,154.34 ; 181.17,154.34 181.17,155.8 183.48,155.8 183.48,161.79 179.11,161.79 179.11,177.17 175.21,177.17 175.21,179.1 P2_U4.2 ; 181.17,154.34 P2_R4.2
P2_N38498: length 40.2
  TOP w0.254: P2_K1.4 165.14,158.47 148.7,158.47 148.7,158.67 127.72,158.67 P2_J3.1
P2_N38548: length 45.5
  BOTTOM w0.254: P2_U1.5 140.16,175.29 140.16,147.7 P2_K1.2
P2_N38656: length 118
  TOP w0.127: v1(184.85,149.89) 162.08,149.89 162.08,142.6 126.17,142.6 126.17,177.83 P2_U1.4
  BOTTOM w0.127: P2_R7.2 v1(184.85,149.89) P2_R8.1
P2_N42817: length 65.1
  TOP w0.254: P2_U1.24 v1(169.71,175.29)
  BOTTOM w0.254: P2_NM1.3 179.78,147.69 169.71,147.69 v1(169.71,175.29)
P2_N42837: length 154.7
  TOP w0.254: P2_U1.7 139.25,170.21 139.25,165.13 P2_U1.20 ; P2_MS1.01 197.56,186.72 P2_DHT1.1
  BOTTOM w0.254: P2_U1.20 145.04,165.13 145.04,168.69 155.66,168.69 ; 197.56,170.84 197.32,170.84 197.32,143.66 186.13,143.66 P2_NM2.3 ; 197.56,170.84 P2_MS1.01 ; 197.56,170.84 198.84,170.84 ; 155.66,168.69 155.66,171.02 ; 155.66,168.69 P2_U2.3 ; 155.66,171.02 163.73,171.02 163.73,186.72 P2_DHT1.1 ; 155.66,171.02 155.02,171.02 P2_U3.1
P2_N43205: length 101.6
  TOP w0.254: P2_U1.9 137.42,165.13 137.42,169.12 134.52,169.12 134.52,174.25 v1(174.71,174.25) 201.84,174.25 v1(201.84,159.41)
  BOTTOM w0.254: P2_C3.1 v1(201.84,159.41) ; P2_CLK2.2 v1(174.71,174.25)
P2_N43213: length 46.9
  TOP w0.254: P2_U1.28 182.6,185.45 182.6,179.1 P2_DHT1.4
P2_N43273: length 38.7
  TOP w0.254: P2_U1.27 181.06,182.91 P2_DHT1.2
P2_N43289: length 58.1
  BOTTOM w0.254: 186.84,144.55 186.84,148.16 194.45,148.16 194.45,166.82 190.16,166.82 190.16,181.64 P2_DHT1.3
P2_N43297: length 60
  TOP w0.254: P2_MS1.03 142.14,188.62 142.14,180.37 P2_U1.26
P2_N43349: length 102.4
  TOP w0.254: v1(191.93,147.06) 202.48,147.06 202.48,177.83 P2_U1.25
  BOTTOM w0.254: P2_NM3.3 193.12,147.23 192.56,147.23 192.56,147.06 v1(191.93,147.06)
P2_N43399: length 47.4
  TOP w0.254: P2_U1.23 143.59,173.74 167.19,173.74 167.19,167.96 v1(179.75,167.96)
  BOTTOM w0.254: v1(179.75,167.96) 179.75,164.5 P2_R1.2
P2_N43483: length 76.5
  TOP w0.254: v1(171.62,162.82) 171.62,161.6 135.97,161.6 P2_U1.10 ; v1(174.71,156.06) v1(201.67,156.06)
  BOTTOM w0.254: v1(171.62,162.82) 174.71,162.82 P2_CLK2.1 v1(174.71,156.06) ; v1(201.67,156.06) 201.67,154.97 P2_C2.1
P2_N43487: length 52.9
  TOP w0.254: v1(170.81,170.73) 179.57,170.73 179.57,171.87 186.13,171.87 P2_SD1.6 ; P2_U1.19 v1(170.81,162.59)
  BOTTOM w0.254: v1(170.81,162.59) v1(170.81,170.73)
P2_N43499: length 63
  TOP w0.254: P2_U1.18 143.59,161.04 190.16,161.04 190.16,171.87 193.75,171.87 P2_SD1.3
P2_N43549: length 49
  BOTTOM w0.254: P2_U3.3 160.1,176.28 134.98,176.28 134.98,157.51 P2_U1.12
P2_N43557: length 61
  TOP w0.254: P2_U1.17 191.22,157.51 P2_SD1.4
P2_N43597: length 56.9
  BOTTOM w0.254: P2_U1.13 134.06,154.97 134.06,176.74 162.64,176.74 P2_U3.4
P2_N43605: length 61
  TOP w0.254: P2_U1.16 v1(188.68,154.97)
  BOTTOM w0.254: 188.68,170.84 v1(188.68,154.97)
P2_N43613: length 45.3
  BOTTOM w0.254: P2_MS1.02 195.03,146.35 193.82,146.35 P2_NM3.1
P2_N43625: length 67.7
  TOP w0.254: P2_U1.14 126.56,152.43 126.56,164.09 165.18,164.09 P2_U3.5
P2_N43633: length 58.4
  TOP w0.254: P2_SD1.7 183.59,163.45 v1(144.58,163.45)
  BOTTOM w0.254: v1(144.58,163.45) 144.58,152.43 P2_U1.15
P2_N435731: length 68
  TOP w0.254: P2_D1.2 160.11,143.54 160.11,152.71 v1(185.21,152.71)
  BOTTOM w0.254: v1(185.21,152.71) 185.21,164.5 P2_R1.1
P2_SOL+: length 119.4
  TOP w0.254: P2_J2.1 151.84,148.62 P2_K1.1 153.99,153.7 153.99,153.98 186.86,153.98 186.86,149.89 v1(193.82,149.89)
  BOTTOM w0.254: P2_U2.1 155.99,164.11 155.99,153.7 P2_K1.1 ; P2_J2.1 126.1,148.62 126.1,171.48 P2_B2.1 ; P2_R7.1 v1(193.82,149.89)
P2_SOL-: length 68.8
  TOP w0.254: v1(168.7,153.34) 157.37,153.34 157.37,146.08 P2_J2.2
  BOTTOM w0.254: v1(168.7,153.34) 168.7,145.43 180.49,145.43 P2_NM1.1
P3_GND: length 255.8
  TOP w0.254: v1(168.34,272.42) v1(178.02,272.42) 196.29,272.42 P3_SD1.2 196.29,267.24 199.18,267.24 v1(199.18,261.6) ; P3_U1.6 141.99,272.75 141.99,270.21 P3_U1.22 156.93,270.21 ; P3_B2.2 127.72,267.67 P3_U1.8 ; v1(185.44,245.41) 191.69,245.41 191.69,245.61 v1(192.32,245.61) ; P3_D1.1 v1(136.96,243.54) ; v1(198.67,253.4) v1(193.51,253.4) ; P3_U3.2 157.56,270.21 156.93,270.21 ; 156.93,270.21 v1(156.93,266.4)
  BOTTOM w0.254: 183.91,252.07 181.17,252.07 181.17,249.89 ; 183.91,252.07 P3_R4.1 ; 183.91,252.07 193.51,252.07 v1(193.51,253.4) 193.64,253.4 193.64,254.34 P3_R5.1 ; P3_NM2.2 v1(185.44,245.41) 181.04,245.41 ; 198.54,254.97 198.54,254.49 198.67,254.49 v1(198.67,253.4) 201.67,253.4 201.67,249.89 P3_C1.1 ; 198.54,254.97 198.54,259.42 ; 198.54,254.97 P3_C2.2 ; P3_RTHERM.2 173.73,249.89 173.73,248.89 181.04,248.89 ; 128.87,268.94 128.87,257.51 P3_J3.2 ; 128.87,268.94 128.87,280.37 P3_B1.2 ; 128.87,268.94 P3_B2.2 ; 136.96,267.67 P3_U1.8 ; 136.96,267.67 136.96,272.75 P3_U1.6 ; 136.96,267.67 136.96,260.05 ; 181.17,249.89 181.04,249.89 181.04,248.89 ; 181.17,249.89 P3_R8.2 ; P3_K1.5 153.84,266.4 v1(156.93,266.4) P3_U2.2 168.34,266.4 v1(168.34,272.42) ; v1(136.96,243.54) 136.96,260.05 ; 136.96,260.05 P3_U1.11 ; 181.04,248.89 181.04,245.41 ; 181.04,245.41 181.04,243.66 179.09,243.66 P3_NM1.2 ; 198.54,259.42 198.54,261.6 v1(199.18,261.6) 201.67,261.6 201.67,263.86 P3_C4.1 ; 198.54,259.42 P3_C3.2 ; P3_U4.4 178.02,276.56 v1(178.02,272.42) ; v1(192.32,245.61) 192.32,244.55 P3_NM3.2
P3_N38120: length 120.2
  TOP w0.254: P3_B1.1 132.07,282.91 132.07,279.38 173.68,279.38 ; v1(177.77,256.88) 198.09,256.88 v1(198.09,263.86) ; 173.68,279.38 174.12,279.38 v1(174.12,280.37) ; 173.68,279.38 v1(173.68,278.46)
  BOTTOM w0.254: 177.77,257.95 182.64,257.95 P3_R2.1 ; 177.77,257.95 v1(177.77,256.88) 177.77,254.34 P3_R6.1 ; 177.77,257.95 176.2,257.95 176.2,274.88 173.68,274.88 173.68,277.83 ; 173.68,277.83 P3_U4.6 ; 173.68,277.83 v1(173.68,278.46) ; P3_C4.2 v1(198.09,263.86) ; P3_U4.1 v1(174.12,280.37)
P3_N38132: length 89.4
  TOP w0.254: v1(168.06,259.42) v1(178.02,259.42)
  BOTTOM w0.254: P3_R2.2 v1(178.02,259.42) 177.38,259.42 177.38,275.34 174.76,275.34 174.76,279.1 P3_U4.7 ; v1(168.06,259.42) 168.06,242.74 200.17,242.74 P3_NM4.1
P3_N38170: length 82.4
  TOP w0.254: v1(198.77,247.7) P3_K1.3
  BOTTOM w0.254: P3_NM4.2 v1(198.77,247.7) 198.13,247.7 198.13,249.89 P3_C1.2 ; P3_U4.8 168.98,280.37 168.98,261.85 163.91,261.85 163.91,247.7 P3_K1.3
P3_N38194: length 24
  TOP w0.254: v1(199.47,248.65) 199.47,254.97 v1(189.49,254.97)
  BOTTOM w0.254: P3_NM4.3 v1(199.47,248.65) ; P3_R3.2 189.42,259.42 189.42,255.6 189.49,255.6 v1(189.49,254.97)
P3_N38286: length 49.3
  BOTTOM w0.254: P3_R3.1 193.01,259.42 193.01,263.16 189.7,263.16 189.7,280.19 178.77,280.19 178.77,279.71 170.29,279.71 170.29,276.56 P3_U4.5
P3_N38318: length 37.9
  BOTTOM w0.254: P3_R5.2 187.62,254.34 187.62,277.83 P3_U4.3
P3_N38338: length 52
  BOTTOM w0.254: 177.77,252.99 181.17,252.99 181.17,254.34 ; 177.77,252.99 177.77,249.89 P3_RTHERM.1 ; 177.77,252.99 174.18,252.99 174.18,254.34 P3_R6.2 ; P3_U4.2 175.21,279.1 175.21,277.17 179.11,277.17 179.11,261.79 183.48,261.79 183.48,255.8 181.17,255.8 181.17,254.34 ; P3_R4.2 181.17,254.34
P3_N38498: length 40.2
  TOP w0.254: P3_J3.1 127.72,258.67 148.7,258.67 148.7,258.47 165.14,258.47 P3_K1.4
P3_N38548: length 45.5
  BOTTOM w0.254: P3_U1.5 140.16,275.29 140.16,247.7 P3_K1.2
P3_N38656: length 118
  TOP w0.127: P3_U1.4 126.17,277.83 126.17,242.6 162.08,242.6 162.08,249.89 v1(184.85,249.89)
  BOTTOM w0.127: P3_R8.1 v1(184.85,249.89) P3_R7.2
P3_N42817: length 65.1
  TOP w0.254: P3_U1.24 v1(169.71,275.29)
  BOTTOM w0.254: P3_NM1.3 179.78,247.69 169.71,247.69 v1(169.71,275.29)
P3_N42837: length 154.7
  TOP w0.254: P3_U1.7 139.25,270.21 139.25,265.13 P3_U1.20 ; P3_MS1.01 197.56,286.72 P3_DHT1.1
  BOTTOM w0.254: P3_MS1.01 197.56,270.85 ; 197.56,270.85 197.32,270.85 197.32,243.66 186.13,243.66 P3_NM2.3 ; 197.56,270.85 198.84,270.85 ; P3_U2.3 155.66,268.69 ; 155.66,268.69 145.04,268.69 145.04,265.13 P3_U1.20 ; 155.66,268.69 155.66,271.02 ; 155.66,271.02 155.02,271.02 P3_U3.1 ; 155.66,271.02 163.73,271.02 163.73,286.72 P3_DHT1.1
P3_N43205: length 101.6
  TOP w0.254: v1(201.84,259.42) 201.84,274.25 v1(174.71,274.25) 134.52,274.25 134.52,269.12 137.42,269.12 137.42,265.13 P3_U1.9
  BOTTOM w0.254: P3_CLK2.2 v1(174.71,274.25) ; P3_C3.1 v1(201.84,259.42)
P3_N43213: length 46.9
  TOP w0.254: P3_U1.28 182.6,285.45 182.6,279.1 P3_DHT1.4
P3_N43273: length 38.7
  TOP w0.254: P3_DHT1.2 181.06,282.91 P3_U1.27
P3_N43289: length 58.1
  BOTTOM w0.254: P3_DHT1.3 190.16,281.64 190.16,266.82 194.45,266.82 194.45,248.16 186.84,248.16 186.84,244.55
P3_N43297: length 60
  TOP w0.254: P3_U1.26 142.14,280.37 142.14,288.62 P3_MS1.03
P3_N43349: length 102.4
  TOP w0.254: v1(191.93,247.06) 202.48,247.06 202.48,277.83 P3_U1.25
  BOTTOM w0.254: v1(191.93,247.06) 192.56,247.06 192.56,247.23 193.12,247.23 P3_NM3.3
P3_N43399: length 47.4
  TOP w0.254: P3_U1.23 143.59,273.74 167.19,273.74 167.19,267.96 v1(179.75,267.96)
  BOTTOM w0.254: v1(179.75,267.96) 179.75,264.5 P3_R1.2
P3_N43483: length 76.5
  TOP w0.254: P3_U1.10 135.97,261.6 171.62,261.6 v1(171.62,262.82) ; v1(174.71,256.06) v1(201.67,256.06)
  BOTTOM w0.254: P3_C2.1 201.67,254.97 v1(201.67,256.06) ; v1(171.62,262.82) 174.71,262.82 P3_CLK2.1 v1(174.71,256.06)
P3_N43487: length 52.9
  TOP w0.254: P3_SD1.6 186.13,271.87 179.57,271.87 179.57,270.73 v1(170.81,270.73) ; P3_U1.19 v1(170.81,262.59)
  BOTTOM w0.254: v1(170.81,262.59) v1(170.81,270.73)
P3_N43499: length 63
  TOP w0.254: P3_SD1.3 193.75,271.87 190.16,271.87 190.16,261.04 143.59,261.04 P3_U1.18
P3_N43549: length 49
  BOTTOM w0.254: P3_U3.3 160.1,276.28 134.98,276.28 134.98,257.51 P3_U1.12
P3_N43557: length 61
  TOP w0.254: P3_SD1.4 191.22,257.51 P3_U1.17
P3_N43597: length 56.9
  BOTTOM w0.254: P3_U1.13 134.06,254.97 134.06,276.74 162.64,276.74 P3_U3.4
P3_N43605: length 61
  TOP w0.254: P3_U1.16 v1(188.68,254.97)
  BOTTOM w0.254: 188.68,270.85 v1(188.68,254.97)
P3_N43613: length 45.3
  BOTTOM w0.254: P3_MS1.02 195.03,246.35 193.82,246.35 P3_NM3.1
P3_N43625: length 67.7
  TOP w0.254: P3_U1.14 126.56,252.43 126.56,264.09 165.18,264.09 P3_U3.5
P3_N43633: length 58.4
  TOP w0.254: P3_SD1.7 183.59,263.45 v1(144.58,263.45)
  BOTTOM w0.254: P3_U1.15 144.58,252.43 v1(144.58,263.45)
P3_N435731: length 68
  TOP w0.254: v1(185.21,252.71) 160.11,252.71 160.11,243.54 P3_D1.2
  BOTTOM w0.254: v1(185.21,252.71) 185.21,264.5 P3_R1.1
P3_SOL+: length 119.4
  TOP w0.254: P3_J2.1 151.84,248.62 P3_K1.1 153.99,253.7 153.99,253.98 186.86,253.98 186.86,249.89 v1(193.82,249.89)
  BOTTOM w0.254: P3_R7.1 v1(193.82,249.89) ; P3_U2.1 155.99,264.11 155.99,253.7 P3_K1.1 ; P3_J2.1 126.1,248.62 126.1,271.48 P3_B2.1
P3_SOL-: length 68.8
  TOP w0.254: P3_J2.2 157.37,246.08 157.37,253.34 v1(168.7,253.34)
  BOTTOM w0.254: P3_NM1.1 180.49,245.43 168.7,245.43 v1(168.7,253.34)
P4_GND: length 255.8
  TOP w0.254: P4_U1.6 141.99,372.75 141.99,370.21 P4_U1.22 156.93,370.21 ; P4_B2.2 127.72,367.67 P4_U1.8 ; v1(185.44,345.41) 191.69,345.41 191.69,345.61 v1(192.32,345.61) ; P4_D1.1 v1(136.96,343.54) ; P4_U3.2 157.56,370.21 156.93,370.21 ; v1(168.34,372.42) v1(178.02,372.42) 196.29,372.42 P4_SD1.2 196.29,367.24 199.18,367.24 v1(199.18,361.6) ; 156.93,370.21 v1(156.93,366.4) ; v1(198.67,353.4) v1(193.51,353.4)
  BOTTOM w0.254: 181.17,349.89 181.17,352.07 183.91,352.07 ; 181.17,349.89 181.04,349.89 181.04,348.89 ; 181.17,349.89 P4_R8.2 ; v1(168.34,372.42) 168.34,366.4 P4_U2.2 v1(156.93,366.4) 153.84,366.4 P4_K1.5 ; 128.87,368.94 128.87,380.37 P4_B1.2 ; 128.87,368.94 128.87,357.51 P4_J3.2 ; 128.87,368.94 P4_B2.2 ; P4_U4.4 178.02,376.56 v1(178.02,372.42) ; 183.91,352.07 193.51,352.07 v1(193.51,353.4) 193.64,353.4 193.64,354.33 P4_R5.1 ; 183.91,352.07 P4_R4.1 ; 198.54,354.97 198.54,359.42 ; 198.54,354.97 P4_C2.2 ; 198.54,354.97 198.54,354.49 198.67,354.49 v1(198.67,353.4) 201.67,353.4 201.67,349.89 P4_C1.1 ; 198.54,359.42 198.54,361.6 v1(199.18,361.6) 201.67,361.6 201.67,363.86 P4_C4.1 ; 198.54,359.42 P4_C3.2 ; P4_NM3.2 192.32,344.55 v1(192.32,345.61) ; v1(136.96,343.54) 136.96,360.05 ; 136.96,360.05 136.96,367.67 ; 136.96,360.05 P4_U1.11 ; P4_U1.6 136.96,372.75 136.96,367.67 ; 136.96,367.67 P4_U1.8 ; P4_NM2.2 v1(185.44,345.41) 181.04,345.41 ; 181.04,348.89 173.73,348.89 173.73,349.89 P4_RTHERM.2 ; 181.04,348.89 181.04,345.41 ; 181.04,345.41 181.04,343.66 179.09,343.66 P4_NM1.2
P4_N38120: length 120.2
  TOP w0.254: 173.68,379.38 132.07,379.38 132.07,382.91 P4_B1.1 ; 173.68,379.38 174.12,379.38 v1(174.12,380.37) ; 173.68,379.38 v1(173.68,378.46) ; v1(177.77,356.88) 198.09,356.88 v1(198.09,363.86)
  BOTTOM w0.254: 173.68,377.83 173.68,374.88 176.2,374.88 176.2,357.95 177.77,357.95 ; 173.68,377.83 v1(173.68,378.46) ; 173.68,377.83 P4_U4.6 ; P4_C4.2 v1(198.09,363.86) ; 177.77,357.95 182.64,357.95 P4_R2.1 ; 177.77,357.95 v1(177.77,356.88) 177.77,354.33 P4_R6.1 ; P4_U4.1 v1(174.12,380.37)
P4_N38132: length 89.4
  TOP w0.254: v1(168.06,359.42) v1(178.02,359.42)
  BOTTOM w0.254: P4_NM4.1 200.17,342.74 168.06,342.74 v1(168.06,359.42) ; P4_R2.2 v1(178.02,359.42) 177.38,359.42 177.38,375.34 174.76,375.34 174.76,379.1 P4_U4.7
P4_N38170: length 82.4
  TOP w0.254: v1(198.77,347.7) P4_K1.3
  BOTTOM w0.254: P4_NM4.2 v1(198.77,347.7) 198.13,347.7 198.13,349.89 P4_C1.2 ; P4_U4.8 168.98,380.37 168.98,361.85 163.91,361.85 163.91,347.7 P4_K1.3
P4_N38194: length 24
  TOP w0.254: v1(199.47,348.65) 199.47,354.97 v1(189.49,354.97)
  BOTTOM w0.254: P4_R3.2 189.42,359.42 189.42,355.61 189.49,355.61 v1(189.49,354.97) ; P4_NM4.3 v1(199.47,348.65)
P4_N38286: length 49.3
  BOTTOM w0.254: P4_U4.5 170.29,376.56 170.29,379.71 178.77,379.71 178.77,380.19 189.7,380.19 189.7,363.16 193.01,363.16 193.01,359.42 P4_R3.1
P4_N38318: length 37.9
  BOTTOM w0.254: P4_R5.2 187.62,354.33 187.62,377.83 P4_U4.3
P4_N38338: length 52
  BOTTOM w0.254: P4_R6.2 174.18,354.33 174.18,352.99 177.77,352.99 ; 181.17,354.33 181.17,352.99 177.77,352.99 ; 181.17,354.33 P4_R4.2 ; 181.17,354.33 181.17,355.8 183.48,355.8 183.48,361.79 179.11,361.79 179.11,377.17 175.21,377.17 175.21,379.1 P4_U4.2 ; 177.77,352.99 177.77,349.89 P4_RTHERM.1
P4_N38498: length 40.2
  TOP w0.254: P4_K1.4 165.14,358.47 148.7,358.47 148.7,358.67 127.72,358.67 P4_J3.1
P4_N38548: length 45.5
  BOTTOM w0.254: P4_K1.2 140.16,347.7 140.16,375.29 P4_U1.5
P4_N38656: length 118
  TOP w0.127: v1(184.85,349.89) 162.08,349.89 162.08,342.6 126.17,342.6 126.17,377.83 P4_U1.4
  BOTTOM w0.127: P4_R7.2 v1(184.85,349.89) P4_R8.1
P4_N42817: length 65.1
  TOP w0.254: P4_U1.24 v1(169.71,375.29)
  BOTTOM w0.254: v1(169.71,375.29) 169.71,347.69 179.78,347.69 P4_NM1.3
P4_N42837: length 154.7
  TOP w0.254: P4_U1.20 139.25,365.13 139.25,370.21 P4_U1.7 ; P4_DHT1.1 197.56,386.72 P4_MS1.01
  BOTTOM w0.254: P4_NM2.3 186.13,343.66 197.32,343.66 197.32,370.85 197.56,370.85 ; 155.66,368.69 145.04,368.69 145.04,365.13 P4_U1.20 ; 155.66,368.69 155.66,371.02 ; 155.66,368.69 P4_U2.3 ; P4_MS1.01 197.56,370.85 ; 197.56,370.85 198.84,370.85 ; 155.66,371.02 163.73,371.02 163.73,386.72 P4_DHT1.1 ; 155.66,371.02 155.02,371.02 P4_U3.1
P4_N43205: length 101.6
  TOP w0.254: v1(201.84,359.42) 201.84,374.25 v1(174.71,374.25) 134.52,374.25 134.52,369.12 137.42,369.12 137.42,365.13 P4_U1.9
  BOTTOM w0.254: P4_C3.1 v1(201.84,359.42) ; P4_CLK2.2 v1(174.71,374.25)
P4_N43213: length 46.9
  TOP w0.254: P4_U1.28 182.6,385.45 182.6,379.1 P4_DHT1.4
P4_N43273: length 38.7
  TOP w0.254: P4_U1.27 181.06,382.91 P4_DHT1.2
P4_N43289: length 58.1
  BOTTOM w0.254: 186.84,344.55 186.84,348.16 194.45,348.16 194.45,366.82 190.16,366.82 190.16,381.64 P4_DHT1.3
P4_N43297: length 60
  TOP w0.254: P4_U1.26 142.14,380.37 142.14,388.62 P4_MS1.03
P4_N43349: length 102.4
  TOP w0.254: v1(191.93,347.06) 202.48,347.06 202.48,377.83 P4_U1.25
  BOTTOM w0.254: v1(191.93,347.06) 192.56,347.06 192.56,347.23 193.12,347.23 P4_NM3.3
P4_N43399: length 47.4
  TOP w0.254: P4_U1.23 143.59,373.74 167.19,373.74 167.19,367.96 v1(179.75,367.96)
  BOTTOM w0.254: P4_R1.2 179.75,364.5 v1(179.75,367.96)
P4_N43483: length 76.5
  TOP w0.254: P4_U1.10 135.97,361.6 171.62,361.6 v1(171.62,362.82) ; v1(174.71,356.06) v1(201.67,356.06)
  BOTTOM w0.254: P4_C2.1 201.67,354.97 v1(201.67,356.06) ; v1(174.71,356.06) P4_CLK2.1 174.71,362.82 v1(171.62,362.82)
P4_N43487: length 52.9
  TOP w0.254: P4_U1.19 v1(170.81,362.59) ; v1(170.81,370.73) 179.57,370.73 179.57,371.87 186.13,371.87 P4_SD1.6
  BOTTOM w0.254: v1(170.81,362.59) v1(170.81,370.73)
P4_N43499: length 63
  TOP w0.254: P4_U1.18 143.59,361.04 190.16,361.04 190.16,371.87 193.75,371.87 P4_SD1.3
P4_N43549: length 49
  BOTTOM w0.254: P4_U1.12 134.98,357.51 134.98,376.28 160.1,376.28 P4_U3.3
P4_N43557: length 61
  TOP w0.254: P4_U1.17 191.22,357.51 P4_SD1.4
P4_N43597: length 56.9
  BOTTOM w0.254: P4_U1.13 134.06,354.97 134.06,376.74 162.64,376.74 P4_U3.4
P4_N43605: length 61
  TOP w0.254: P4_U1.16 v1(188.68,354.97)
  BOTTOM w0.254: 188.68,370.85 v1(188.68,354.97)
P4_N43613: length 45.3
  BOTTOM w0.254: P4_NM3.1 193.82,346.35 195.03,346.35 P4_MS1.02
P4_N43625: length 67.7
  TOP w0.254: P4_U3.5 165.18,364.09 126.56,364.09 126.56,352.43 P4_U1.14
P4_N43633: length 58.4
  TOP w0.254: P4_SD1.7 183.59,363.45 v1(144.58,363.45)
  BOTTOM w0.254: P4_U1.15 144.58,352.43 v1(144.58,363.45)
P4_N435731: length 68
  TOP w0.254: v1(185.21,352.71) 160.11,352.71 160.11,343.54 P4_D1.2
  BOTTOM w0.254: P4_R1.1 185.21,364.5 v1(185.21,352.71)
P4_SOL+: length 119.4
  TOP w0.254: v1(193.82,349.89) 186.86,349.89 186.86,353.98 153.99,353.98 153.99,353.7 P4_K1.1 151.84,348.62 P4_J2.1
  BOTTOM w0.254: P4_J2.1 126.1,348.62 126.1,371.48 P4_B2.1 ; P4_R7.1 v1(193.82,349.89) ; P4_K1.1 155.99,353.7 155.99,364.11 P4_U2.1
P4_SOL-: length 68.8
  TOP w0.254: v1(168.7,353.34) 157.37,353.34 157.37,346.08 P4_J2.2
  BOTTOM w0.254: v1(168.7,353.34) 168.7,345.43 180.49,345.43 P4_NM1.1

## Copper pours and planes (outline as drawn; the poured copper is in the pictures)
Net_154 on BOTTOM (solid shape): outline of 237 points within 1,1 319,186
Net_155 on BOTTOM (solid shape): outline of 358 points within 1,244 319,429
Net_156 on TOP (solid shape): outline of 237 points within 1,1 319,186
Net_157 on TOP (solid shape): outline of 358 points within 1,244 319,429
Net_158 on TOP (solid shape): 20,410.01 19.99,410 13.6,410 15.47,414.53 20,416.4
Net_159 on TOP (solid shape): 26.4,410 24.53,405.47 20,403.6 20,409.99 20.01,410
Net_160 on TOP (solid shape): 300,410.01 299.99,410 293.6,410 295.47,414.53 300,416.4
Net_161 on TOP (solid shape): 306.4,410 304.53,405.47 300,403.6 300,409.99 300.01,410
Net_162 on TOP (solid shape): 300,20.01 299.99,20 293.6,20 295.47,24.53 300,26.4
Net_163 on TOP (solid shape): 306.4,20 304.53,15.47 300,13.6 300,19.99 300.01,20
Net_164 on TOP (solid shape): 20,20.01 19.99,20 13.6,20 15.47,24.53 20,26.4
Net_165 on TOP (solid shape): 26.4,20 24.53,15.47 20,13.6 20,19.99 20.01,20

## Text on the board
User.8: FIGURE | FINISHED_SIZE | 0.3302 | 0.8128 | 0.889 | 1.016 | 1.0201 | 1.143 | 1.3 | 2.8 | DRILL CHART: TOP to BOTTOM | ALL UNITS ARE IN MILLIMETERS | PLATED | NON-PLATED | QTY | 136 | 112 | 32 | 36 | 12 | 20 | 3
